# EAGLE board Connector (EAGLE 9.3.1)
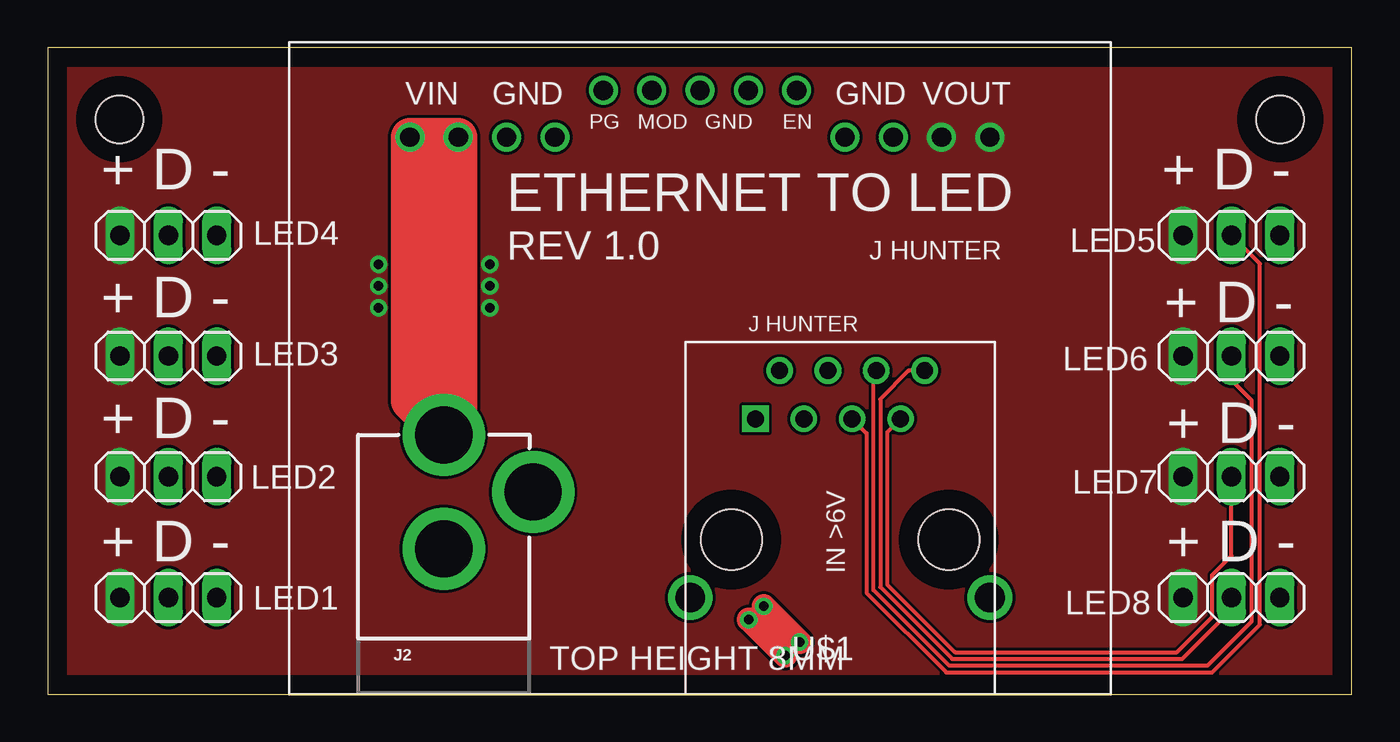
[diagram p0: board, top side]
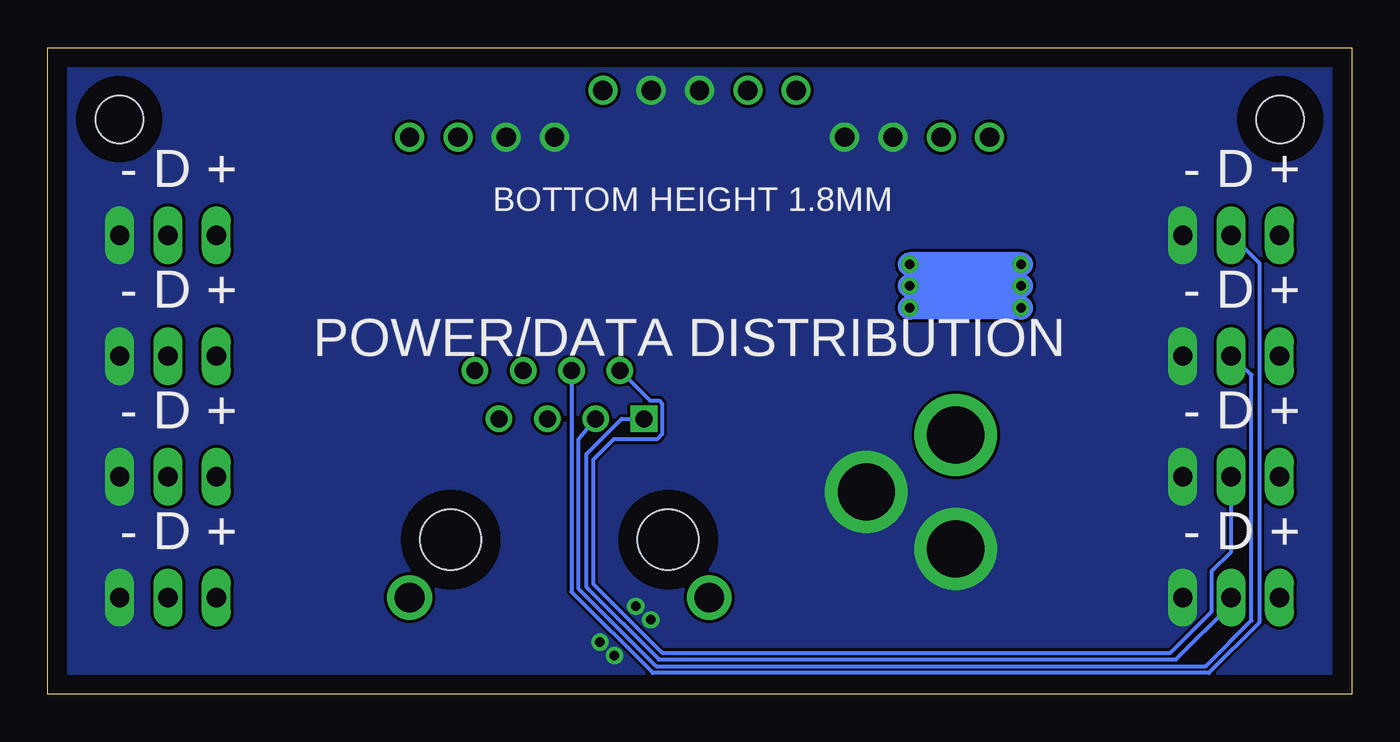
[diagram p1: board, bottom side, seen from below]

Size 68.56 x 34 mm. Coordinates in mm from the lower left corner, seen from the top.
Outline: 0,0 68.56,0 68.56,34 0,34 0,0
Copper layers (1*16): Top 0.035mm / dielectric 1.5mm / Bottom 0.035mm
Design rules "default": minimum track width 6mil, minimum drill 0.35mm, track to track 6mil, track to pad 6mil, pad to pad 6mil, via to via 6mil, smd to smd 6mil, copper to edge 40mil, drill to drill 6mil, minimum pad ring 10mil, minimum via ring 8mil, stop-mask expansion 4mil, vias tented up to drill 0mil, thermal gap 10mil
Holes 2.5 mm at 3.77,30.23 64.79,30.23

## Footprints (pad centres in the part's own frame; a part is rotated, then mirrored left to right if it is on the bottom)
POWER_JACK_PTH = drill 2.997 pad 4.318: GND 0,7.7; GNDBREAK 4.7,10.7; PWR 0,13.7
1X03 = drill 1.016 long: 1 -2.54,0; 2 0,0; 3 2.54,0
RJ45_WINGS = drill 0.89 square: 1 -4.445,6.35 | drill 0.89: 2 -3.175,8.89; 3 -1.905,6.35; 4 -0.635,8.89; 5 0.635,6.35; 6 1.905,8.89; 7 3.175,6.35; 8 4.445,8.89 | drill 1.57: GND@1 -7.875,-3.05; GND@2 7.875,-3.05 | hole 3.2: -5.715,0; 5.715,0
D24V150F = drill 1.016: EN -5.08,0; GND@1 -10.16,2.464; GND@2 -7.62,2.464; GND@3 7.62,2.464; GND@4 10.16,2.464; GND@5 0,0; GND@6 -2.54,0; MOD 2.54,0; PC 5.08,0; VIN@1 12.7,2.464; VIN@2 15.24,2.464; VOUT@1 -15.24,2.464; VOUT@2 -12.7,2.464

## Placement (x,y rotation side)
J2  POWER_JACK  [POWER_JACK_PTH]  20.83,-0.06 0 top
JP1  [1X03]  62.23,5.08 0 top
JP2  [1X03]  62.23,11.43 0 top
JP3  [1X03]  62.23,17.78 0 top
JP4  [1X03]  62.23,24.13 0 top
JP5  [1X03]  6.35,24.13 0 top
JP6  [1X03]  6.35,17.78 0 top
JP7  [1X03]  6.35,11.43 0 top
JP8  [1X03]  6.35,5.08 0 top
U$1  RJ45  [RJ45_WINGS]  41.66,8.13 0 top
U$2  5V-15A-VOLTAGE_CONVERTER  [D24V150F]  34.29,31.75 180 top

## Library data of the parts
J2 = SparkFun-Connectors; PROD_ID: CONN-08197
JP1-JP8 = pinhead
U$1 U$2 = myParts

## Nets
GND: J2.GND J2.GNDBREAK JP1.3 JP2.3 JP3.3 JP4.3 JP5.3 JP6.3 JP7.3 JP8.3 U$2.GND@1 U$2.GND@2 U$2.GND@3 U$2.GND@4 U$2.GND@5 U$2.GND@6
LED1: JP8.2 U$1.1
LED2: JP7.2 U$1.2
LED3: JP6.2 U$1.3
LED4: JP5.2 U$1.4
LED5: JP4.2 U$1.5
LED6: JP3.2 U$1.6
LED7: JP2.2 U$1.7
LED8: JP1.2 U$1.8
VIN: J2.PWR U$2.VIN@1 U$2.VIN@2
VOUT: JP1.1 JP2.1 JP3.1 JP4.1 JP5.1 JP6.1 JP7.1 JP8.1 U$2.VOUT@1 U$2.VOUT@2

## Tracks (layer width: path | path; a pad name or v marks a point on that pad's centre or on a via)
GND  (via drill 0.5)
  Top 1.27: v39.52,2.74 v37.64,4.62 | v38.76,2.03 38.76,2.06 36.91,3.91 v36.85,3.91
  pour Bottom (no thermals): 0,35.56 68.58,35.56 68.58,0 0,0
LED1
  Bottom 0.203: JP8.2 6.35,4.72 9.25,1.83 36.42,1.83 40.24,5.65 40.24,12.62 38.38,14.48 U$1.1
LED2
  Bottom 0.203: JP7.2 6.35,7.49 7.37,6.48 7.37,4.37 9.55,2.18 36.25,2.18 39.88,5.81 39.88,12.32 38.8,13.4 36.53,13.4 36.26,13.67 36.26,15.28 36.41,15.43 36.89,15.43 U$1.2
LED3
  Bottom 0.203: U$1.3 40.64,13.41 40.64,5.54 36.58,1.47 7.69,1.47 5.28,3.88 5.28,16.79 JP6.2
LED4
  Bottom 0.203: JP5.2 4.88,22.66 4.88,3.76 7.52,1.12 36.74,1.12 41.02,5.39 U$1.4
LED5
  Top 0.203: U$1.5 43.05,13.72 43.05,5.33 47.24,1.14 61.21,1.14 63.73,3.66 63.73,22.63 JP4.2
LED6
  Top 0.203: JP3.2 62.23,16.51 63.27,15.47 63.27,3.81 60.96,1.5 47.39,1.5 43.41,5.48 43.41,16.87 U$1.6
LED7
  Top 0.203: U$1.7 44.12,13.77 44.12,5.79 47.7,2.21 59.36,2.21 61.21,4.06 61.21,6.26 62.23,7.28 JP2.2
LED8
  Top 0.203: U$1.8 45.26,17.02 43.76,15.52 43.76,5.64 47.55,1.85 59.64,1.85 62.23,4.45 JP1.2
VIN
  Top 2.032: U$2.VIN@2 U$2.VIN@1 21.59,13.97 21.26,13.64 | 21.26,13.64 J2.PWR 19.05,15.41 U$2.VIN@2 | U$2.VIN@2 20.32,28.02 20.32,14.57 21.26,13.64
VOUT  (via drill 0.5)
  Bottom 1.27: v17.4,22.61 v23.24,22.61 | v23.24,21.46 v17.4,21.46 | v17.4,20.32 v23.24,20.32
  pour Top (no thermals): 0,34.29 68.58,34.29 68.58,0 0,0

## Text on the board
tNames: VIN | GND | GND | VOUT | PG | MOD | GND | EN | + D - | + D - | ETHERNET TO LED | LED4 | REV 1.0 | J HUNTER | LED5 | + D - | + D - | J HUNTER | LED3 | LED6 | + D - | + D - | LED2 | LED7 | + D - | + D - | IN >6V | LED1 | LED8
bNames: - D + | - D + | - D + | - D + | POWER/DATA DISTRIBUTION | - D + | - D + | - D + | - D +